# EAGLE board Arduino_Nano_Clock_Divider_Offset_board1 (EAGLE 9.1.1)
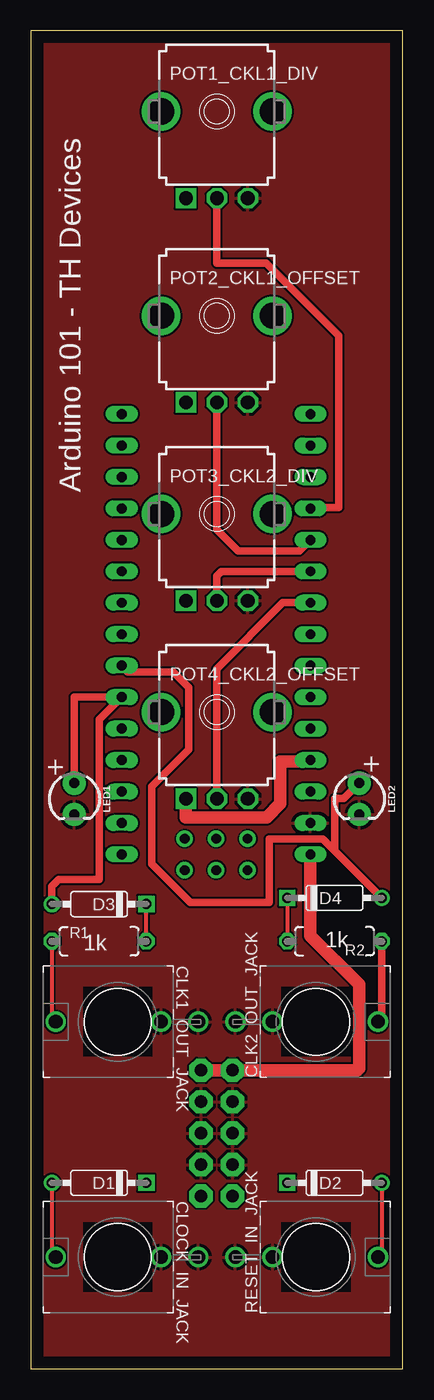
[diagram p0: board, top side]
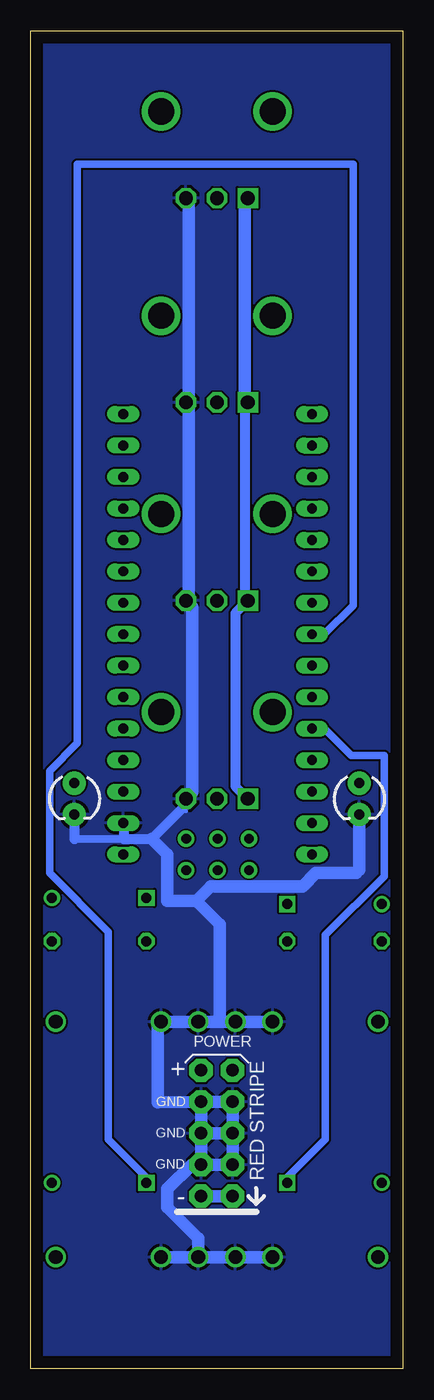
[diagram p1: board, bottom side, seen from below]

Size 30 x 108 mm. Coordinates in mm from the lower left corner, seen from the top.
Outline: 0,0 30,0 30,108 0,108 0,0
Copper layers (1*16): Top 0.035mm / dielectric 1.5mm / Bottom 0.035mm
Design rules "default": minimum track width 6mil, minimum drill 0.35mm, track to track 6mil, track to pad 6mil, pad to pad 6mil, via to via 6mil, smd to smd 6mil, copper to edge 40mil, drill to drill 6mil, minimum pad ring 10mil, minimum via ring 8mil, stop-mask expansion 4mil, vias tented up to drill 0mil, thermal gap 10mil

## Footprints (pad centres in the part's own frame; a part is rotated, then mirrored left to right if it is on the bottom)
WQP-PJ301M-12_JACK = drill 1.1: P$1_TIP 0,5; P$2_SWITCH 0,-3.5; P$3_SLEEVE 0,-6.5
DO35-7 = drill 0.813: A 3.81,0 | drill 0.813 square: C -3.81,0
LED_3MM = drill 0.813 pad 1.88: A -1.27,0; K 1.27,0
9MM_SNAP-IN_POT = drill 1.1 square: 1 -2.5,-7 | drill 1.1 octagon: 2 0,-7; 3 2.5,-7 | drill 2.1 pad 2.794: CHASSIS1 -4.5,0; CHASSIS2 4.5,0
7MM_RESISTOR = drill 0.813 octagon: 1 -3.81,0; 2 3.81,0
EURO_PWR_HEADER_FAT = drill 1.016 pad 1.88 octagon: 1 -5.08,-1.27; 2 -5.08,1.27; 3 -2.54,-1.27; 4 -2.54,1.27; 5 0,-1.27; 6 0,1.27; 7 2.54,-1.27; 8 2.54,1.27; 9 5.08,-1.27; 10 5.08,1.27
NANO = drill 0.8 long: 3.3V -10.16,24.13; 5V -10.16,-1.27; A0 -10.16,19.05; A1 -10.16,16.51; A2 -10.16,13.97; A3 -10.16,11.43; A4 -10.16,8.89; A5 -10.16,6.35; A6 -10.16,3.81; A7 -10.16,1.27; AREF -10.16,21.59; D2 5.08,1.27; D3 5.08,3.81; D4 5.08,6.35; D5 5.08,8.89; D6 5.08,11.43; D7 5.08,13.97; D8 5.08,16.51; D9 5.08,19.05; D10 5.08,21.59; D11 5.08,24.13; D12 5.08,26.67; D13 -10.16,26.67; GND -10.16,-6.35; GND1 5.08,-1.27; RAW -10.16,-8.89; RST -10.16,-3.81; RST1 5.08,-3.81; RX1 5.08,-6.35; TX0 5.08,-8.89 | drill 0.8: ICSP1 -5.08,-10.16; ICSP2 -5.08,-7.62; ICSP3 -2.54,-10.16; ICSP4 -2.54,-7.62; ICSP5 0,-10.16; ICSP6 0,-7.62

## Placement (x,y rotation side)
CLK1_OUT_JACK  THONKICONNNEW  [WQP-PJ301M-12_JACK]  7,28 90 top
CLK2_OUT_JACK  THONKICONNNEW  [WQP-PJ301M-12_JACK]  23,28 270 top
CLOCK_IN_JACK  THONKICONNNEW  [WQP-PJ301M-12_JACK]  7,9 90 top
D1  1N4148  [DO35-7]  5.5,15 180 top
D2  1N4148  [DO35-7]  24.5,15 0 top
D3  1N4148  [DO35-7]  5.5,37.5 180 top
D4  1N4148  [DO35-7]  24.5,38 0 top
LED1  [LED_3MM]  3.5,46 270 top
LED2  [LED_3MM]  26.5,46 270 top
POT1_CKL1_DIV  100k  [9MM_SNAP-IN_POT]  15,101.5 0 top
POT2_CKL1_OFFSET  100k  [9MM_SNAP-IN_POT]  15,85 0 top
POT3_CKL2_DIV  100k  [9MM_SNAP-IN_POT]  15,69 0 top
POT4_CKL2_OFFSET  100k  [9MM_SNAP-IN_POT]  15,53 0 top
R1  1k  [7MM_RESISTOR]  5.5,34.5 0 top
R2  1k  [7MM_RESISTOR]  24.5,34.5 180 top
RESET_IN_JACK  THONKICONNNEW  [WQP-PJ301M-12_JACK]  23,9 270 top
SV1  EURO_POWER_HEADERFAT_PADS  [EURO_PWR_HEADER_FAT]  15,19 90 bottom
U$1  NANO  [NANO]  12.4,50.4 0 bottom

## Library data of the parts
CLK1_OUT_JACK CLK2_OUT_JACK CLOCK_IN_JACK D1-D4 POT1_CKL1_DIV POT2_CKL1_OFFSET POT3_CKL2_DIV POT4_CKL2_OFFSET R1 R2 RESET_IN_JACK SV1 = MusicThingModular
LED1 LED2 = SparkFun-LED; PROD_ID: DIO-08794; SPICEPREFIX: L
U$1 = Arduino-clone

## Nets
-12V: SV1.1 SV1.2
ARDUINO_+5V: POT1_CKL1_DIV.1 POT2_CKL1_OFFSET.1 POT3_CKL2_DIV.1 POT4_CKL2_OFFSET.1 U$1.5V
ARDUINO_A0: POT1_CKL1_DIV.2 U$1.A0
ARDUINO_A1: POT2_CKL1_OFFSET.2 U$1.A1
ARDUINO_A2: POT3_CKL2_DIV.2 U$1.A2
ARDUINO_A3: POT4_CKL2_OFFSET.2 U$1.A3
ARDUINO_CLK_IN: D1.C U$1.D2
ARDUINO_D0: D3.A LED1.A U$1.D3
ARDUINO_D1: D4.A LED2.A U$1.D4
ARDUINO_RST_IN: D2.C U$1.D5
CLOCK_IN_ARD: CLOCK_IN_JACK.P$1_TIP D1.A
GND: CLK1_OUT_JACK.P$2_SWITCH CLK1_OUT_JACK.P$3_SLEEVE CLK2_OUT_JACK.P$2_SWITCH CLK2_OUT_JACK.P$3_SLEEVE CLOCK_IN_JACK.P$2_SWITCH CLOCK_IN_JACK.P$3_SLEEVE LED1.K LED2.K POT1_CKL1_DIV.3 POT2_CKL1_OFFSET.3 POT3_CKL2_DIV.3 POT4_CKL2_OFFSET.3 RESET_IN_JACK.P$2_SWITCH RESET_IN_JACK.P$3_SLEEVE SV1.3 SV1.4 SV1.5 SV1.6 SV1.7 SV1.8 U$1.GND
N$3: D2.A RESET_IN_JACK.P$1_TIP
N$4: D3.C R1.2
N$5: D4.C R2.2
N$17: CLK2_OUT_JACK.P$1_TIP R2.1
N$18: CLK1_OUT_JACK.P$1_TIP R1.1
VCC: SV1.9 SV1.10 U$1.RAW

## Tracks (layer width: path | path; a pad name or v marks a point on that pad's centre or on a via)
-12V
  Bottom 1.016: SV1.1 SV1.2
ARDUINO_+5V
  Top 1.016: POT4_CKL2_OFFSET.1 12.5,44.5 19.01,44.5 20.13,45.62 20.13,49 22.56,49 U$1.5V
  Bottom 0.813: POT4_CKL2_OFFSET.1 13.5,47 13.5,61 POT3_CKL2_DIV.1 12.75,62.25 12.75,77.75 POT2_CKL1_OFFSET.1
  Bottom 1.016: POT1_CKL1_DIV.1 12.75,94.25 12.75,78.25 POT2_CKL1_OFFSET.1
ARDUINO_A0
  Top 0.305: 22.61,69.5 U$1.A0
  Top 0.61: POT1_CKL1_DIV.2 15,89.25 19,89.25 24.83,83.42 24.83,69.5 22.61,69.5
ARDUINO_A1
  Top 0.61: POT2_CKL1_OFFSET.2 15,67.75 16.75,66 21.65,66 U$1.A1
ARDUINO_A2
  Top 0.61: POT3_CKL2_DIV.2 15,64 15.37,64.37 U$1.A2
ARDUINO_A3
  Top 0.61: U$1.A3 20.33,61.83 15,56.5 POT4_CKL2_OFFSET.2
ARDUINO_CLK_IN
  Bottom 0.305: 9.31,15.44 D1.C | U$1.D2 6.32,51.67
  Bottom 0.61: 6.32,51.67 4.15,49.5 1.5,49.5 1.5,39.75 6.25,35 6.25,18.5 9.31,15.44
ARDUINO_D0
  Top 0.61: D3.A 1.69,38.94 2.25,39.5 5.5,39.5 5.5,52.39 U$1.D3 3.5,54.21 LED1.A
ARDUINO_D1
  Top 0.305: 12.38,38.12 12.5,38 | 24.41,41.91 24.53,41.78
  Top 0.61: U$1.D4 7.82,56.25 11.5,56.25 12.75,55 12.75,50 9.75,47 9.75,40.75 12.38,38.12 12.88,37.62 19.25,37.62 19.25,42.75 23.56,42.75 24.41,41.91 | D4.A 24.53,41.78 24.53,41.91 24.53,46.02 25.25,46.02 LED2.A
ARDUINO_RST_IN
  Bottom 0.305: 20.69,15.44 D2.C
  Bottom 0.61: 20.69,15.44 23.75,18.5 23.75,35.25 28.5,40 28.5,48.25 26.25,50.5 26.25,97.25 4,97.25 4,61.61 6.32,59.29 U$1.D5
CLOCK_IN_ARD
  Top 0.305: D1.A 1.69,9.31 CLOCK_IN_JACK.P$1_TIP
GND
  Bottom 0.305: SV1.4 16,16.46 17.04,16.46 | POT4_CKL2_OFFSET.3 17.5,45.5 17.5,45 | SV1.6 16.5,19 16.27,19.23 | 16,28.5 CLK2_OUT_JACK.P$3_SLEEVE | 16.54,21.54 SV1.8
  Bottom 0.61: 26.5,42.75 22.5,42.75
  Bottom 0.813: LED2.K 26.5,42.75 | 17.5,45.5 20.25,42.75 22.5,42.75 22.5,43.99 U$1.GND
  Bottom 1.016: 16,16.46 SV1.3 SV1.5 | SV1.5 SV1.6 SV1.4 | SV1.8 SV1.7 SV1.5 | SV1.8 16.27,19.23 | CLOCK_IN_JACK.P$2_SWITCH CLOCK_IN_JACK.P$3_SLEEVE RESET_IN_JACK.P$3_SLEEVE | RESET_IN_JACK.P$3_SLEEVE RESET_IN_JACK.P$2_SWITCH | RESET_IN_JACK.P$3_SLEEVE 16.5,10.5 19,13 19,14.5 17.04,16.46 | CLK1_OUT_JACK.P$2_SWITCH CLK1_OUT_JACK.P$3_SLEEVE 14.75,28 | 14.75,28 CLK2_OUT_JACK.P$3_SLEEVE CLK2_OUT_JACK.P$2_SWITCH 19.75,27.5 19.75,21.5 SV1.8 | POT4_CKL2_OFFSET.3 17,46.5 17,61.5 POT3_CKL2_DIV.3 17.25,62.25 17.25,77.75 POT2_CKL1_OFFSET.3 17.25,78.25 17.25,94.25 POT1_CKL1_DIV.3 | 11.86,38.93 11.85,38.93 | 11.86,38.93 15.48,38.93 16.66,37.75 | 16.66,37.75 19,37.75 19,41.5 20.25,42.75 | 14.75,28 14.75,35.84 16.66,37.75 | 11.86,38.93 8.07,38.93 7,40 3.75,40 3.5,40.25 LED1.K
  pour Top: 0.25,0 0.25,108 29.75,108 30,107.75 30,0.25 29.75,0
  pour Bottom: 0.25,0 0.25,107.5 0,107.75 30,107.75 30.25,107.5 30.25,0.25 29.75,-0.25 0.5,-0.25
N$3
  Top 0.305: D2.A 28.31,9.31 RESET_IN_JACK.P$1_TIP
N$4
  Top 0.305: R1.2 D3.C
N$5
  Top 0.305: D4.C R2.2
N$17
  Top 0.305: 28.31,28.31 CLK2_OUT_JACK.P$1_TIP
  Top 0.61: R2.1 28.31,28.31
N$18
  Top 0.305: R1.1 1.69,28.31 CLK1_OUT_JACK.P$1_TIP
VCC
  Top 1.016: U$1.RAW 22.56,34.95 26.5,31.01 26.5,24.25 26.33,24.08 SV1.10 SV1.9

## Text on the board
tPlace: Arduino 101 - TH Devices | + | + | 1k | 1k